# EAGLE board 2 bit calculator (EAGLE 9.7.0)

Size 198.19 x 253.51 mm. Coordinates in mm from the lower left corner, seen from the top.
Outline: 0,0 198.19,0 198.19,253.51 0,253.51 0,0
Copper layers (1*16): Top 0.035mm / dielectric 1.5mm / Bottom 0.035mm
Design rules "default": minimum track width 6mil, minimum drill 0.35mm, track to track 6mil, track to pad 6mil, pad to pad 6mil, via to via 6mil, smd to smd 6mil, copper to edge 40mil, drill to drill 6mil, minimum pad ring 10mil, minimum via ring 8mil, stop-mask expansion 4mil, vias tented up to drill 0mil, thermal gap 10mil

## Footprints (pad centres in the part's own frame; a part is rotated, then mirrored left to right if it is on the bottom)
LEDRD254W60D565H860B = drill 0.981 pad 1.581: 1 -1.27,0; 2 1.27,0
LEDRD254W60D565H860B_B = drill 0.981 pad 1.581: 1 -1.27,0; 2 1.27,0
LEDRD254W60D565H860B_Y = drill 0.981 pad 1.581: 1 -1.27,0; 2 1.27,0
BATTERY-GENERIC = drill 1.118 pad 3.15 octagon: + 2.54,0; - -2.54,0
SWITCH-SPDT-PTH-8.5X3.7MM = drill 1.016 pad 1.88: 1 -2.54,0; 2 0,0; 3 2.54,0
78B04ST = drill 0.8: 1 -3.81,-3.81; 2 -1.27,-3.81; 3 1.27,-3.81; 4 3.81,-3.81; 5 3.81,3.81; 6 1.27,3.81; 7 -1.27,3.81; 8 -3.81,3.81
DIP762W53P254L1969H508Q14B = drill 0.743 pad 1.343: 1 -3.81,7.62; 2 -3.81,5.08; 3 -3.81,2.54; 4 -3.81,0; 5 -3.81,-2.54; 6 -3.81,-5.08; 7 -3.81,-7.62; 8 3.81,-7.62; 9 3.81,-5.08; 10 3.81,-2.54; 11 3.81,0; 12 3.81,2.54; 13 3.81,5.08; 14 3.81,7.62

## Placement (x,y rotation side)
D1  RED  [LEDRD254W60D565H860B]  37.28,230.36 180 top
D2  RED  [LEDRD254W60D565H860B]  42.36,230.36 180 top
D3  RED  [LEDRD254W60D565H860B]  49.98,230.36 180 top
D4  RED  [LEDRD254W60D565H860B]  55.06,230.36 180 top
D5  BLUE  [LEDRD254W60D565H860B_B]  161.74,245.6 180 top
D6  BLUE  [LEDRD254W60D565H860B_B]  166.82,245.6 180 top
D7  BLUE  [LEDRD254W60D565H860B_B]  171.9,245.6 180 top
D8  BLUE  [LEDRD254W60D565H860B_B]  169,191.49 180 top
D9  YELLOW  [LEDRD254W60D565H860B_Y]  174.08,191.49 180 top
D10  YELLOW  [LEDRD254W60D565H860B_Y]  179.16,191.49 180 top
D11  YELLOW  [LEDRD254W60D565H860B_Y]  192.13,132.45 180 top
D12  YELLOW  [LEDRD254W60D565H860B_Y]  187.05,132.45 180 top
D13  YELLOW  [LEDRD254W60D565H860B_Y]  181.97,132.45 180 top
D14  YELLOW  [LEDRD254W60D565H860B_Y]  176.89,132.45 180 top
D15  YELLOW  [LEDRD254W60D565H860B_Y]  171.82,76.2 180 top
D16  YELLOW  [LEDRD254W60D565H860B_Y]  176.9,76.2 180 top
D17  YELLOW  [LEDRD254W60D565H860B_Y]  181.98,76.2 180 top
P1  BATTERYGENERIC  [BATTERY-GENERIC]  8.26,213.36 180 top
S1  TOGGLE  [SWITCH-SPDT-PTH-8.5X3.7MM]  61.41,240.52 0 top
SW2  SPST-478B04ST  [78B04ST]  47.44,213.85 0 top
U1  74HC86_PDIP  [DIP762W53P254L1969H508Q14B]  96.97,234.17 90 top
U2  74HC08_PDIP  [DIP762W53P254L1969H508Q14B]  119.83,234.17 90 top
U3  74HC04_PDIP  [DIP762W53P254L1969H508Q14B]  74.11,234.17 90 top
U4  74HC32_PDIP  [DIP762W53P254L1969H508Q14B]  142.69,234.17 90 top
U5  74HC04_PDIP  [DIP762W53P254L1969H508Q14B]  61.05,177.52 90 top
U6  74HC11_PDIP  [DIP762W53P254L1969H508Q14B]  81.37,177.52 90 top
U7  74HC11_PDIP  [DIP762W53P254L1969H508Q14B]  99.15,177.52 90 top
U8  74HC32_PDIP  [DIP762W53P254L1969H508Q14B]  137.25,177.52 90 top
U9  74HC32_PDIP  [DIP762W53P254L1969H508Q14B]  157.57,177.52 90 top
U10  74HC08_PDIP  [DIP762W53P254L1969H508Q14B]  116.93,177.52 90 top
U11  74HC21_PDIP  [DIP762W53P254L1969H508Q14B]  63.86,121.02 90 top
U12  74HC11_PDIP  [DIP762W53P254L1969H508Q14B]  86.72,121.02 90 top
U13  74HC11_PDIP  [DIP762W53P254L1969H508Q14B]  122.28,121.02 90 top
U14  74HC08_PDIP  [DIP762W53P254L1969H508Q14B]  142.6,121.02 90 top
U15  74HC32_PDIP  [DIP762W53P254L1969H508Q14B]  162.92,121.02 90 top
U16  74HC04_PDIP  [DIP762W53P254L1969H508Q14B]  104.5,121.02 90 top
U17  74HC04_PDIP  [DIP762W53P254L1969H508Q14B]  61.33,64.77 90 top
U18  74HC04_PDIP  [DIP762W53P254L1969H508Q14B]  63.84,8.41 90 top
U19  74HC08_PDIP  [DIP762W53P254L1969H508Q14B]  134.99,64.77 90 top
U20  74HC11_PDIP  [DIP762W53P254L1969H508Q14B]  86.73,64.77 90 top
U21  74HC11_PDIP  [DIP762W53P254L1969H508Q14B]  109.59,64.77 90 top
U22  74HC21_PDIP  [DIP762W53P254L1969H508Q14B]  91.78,8.41 90 top
U23  74HC21_PDIP  [DIP762W53P254L1969H508Q14B]  117.18,8.41 90 top
U24  74HC32_PDIP  [DIP762W53P254L1969H508Q14B]  157.85,64.77 90 top
U25  74HC32_PDIP  [DIP762W53P254L1969H508Q14B]  145.12,8.41 90 top

## Library data of the parts
D1-D4 = Tinkercad; CATEGORY: Opto-Electronic; SUB-CATEGORY: LED; VALUE: LED_RED
D5-D8 = Tinkercad; CATEGORY: Opto-Electronic; SUB-CATEGORY: LED; VALUE: LED_BLUE
D9-D17 = Tinkercad; CATEGORY: Opto-Electronic; SUB-CATEGORY: LED; VALUE: LED_YELLOW
P1 S1 SW2 U1-U25 = Tinkercad

## Nets
P1+: P1.+ S1.2 SW2.1 SW2.2 SW2.3 SW2.4 U1.14 U2.14 U3.14 U4.14 U5.14 U6.14 U7.14 U8.14 U9.14 U10.14 U11.14 U12.14 U13.14 U14.14 U15.14 U16.14 U17.14 U18.14 U19.14 U20.14 U21.14 U22.14 U23.14 U24.14 U25.14
P1-: D1.2 D2.2 D3.2 D4.2 D5.2 D6.2 D7.2 D8.2 D9.2 D10.2 D11.2 D12.2 D13.2 D14.2 D15.2 D16.2 D17.2 P1.- U1.7 U2.7 U3.7 U4.7 U5.7 U6.7 U7.7 U8.7 U9.7 U10.7 U11.7 U12.7 U13.7 U14.7 U15.7 U16.7 U17.7 U18.7 U19.7 U20.7 U21.7 U22.7 U23.7 U24.7 U25.7
U1_1Y: U1.3 U1.9 U2.1
U1_2Y: U1.6 U1.12 U2.9
U1_3Y: D7.1 U1.8
U1_4B: U1.13 U2.10 U4.3
U1_4Y: D6.1 U1.11
U2_1B: U2.2 U3.2
U2_1Y: U2.3 U4.1
U2_2Y: U2.6 U4.2
U2_3Y: U2.8 U4.12
U2_4Y: U2.11 U4.13
U3_1A: S1.3 U3.1 U3.13
U3_6Y: U1.10 U3.12
U4_4Y: D5.1 U4.11
U6_1Y: U6.12 U8.12
U6_2Y: U6.6 U8.10
U6_3B: U5.4 U6.2 U6.3 U6.10 U10.4
U6_3Y: U6.8 U9.12
U7_1Y: U7.12 U9.9
U7_2B: U5.12 U7.4 U7.13
U7_2C: U5.8 U7.5 U10.13
U7_2Y: U7.6 U9.10
U7_3A: U5.2 U6.1 U6.9 U7.9 U10.1
U7_3Y: U7.8 U9.13
U8_1Y: D10.1 U8.3
U8_3Y: D8.1 U8.8
U8_4Y: U8.9 U8.11
U9_2Y: D9.1 U9.6
U9_3Y: U9.5 U9.8
U9_4Y: U9.4 U9.11
U10_1Y: U8.13 U10.3
U10_2Y: U8.1 U10.6
U10_4Y: U8.2 U10.11
U11_1Y: D14.1 U11.6
U12_1Y: U12.12 U15.1
U12_2Y: U12.6 U15.2
U12_3Y: U12.8 U15.12
U13_1Y: U13.12 U15.13
U13_2Y: U13.6 U15.4
U13_3C: U12.13 U13.11 U16.8
U13_3Y: U13.8 U15.5
U14_4Y: D11.1 U14.11
U15_1Y: D13.1 U15.3
U15_2Y: U15.6 U15.10
U15_3Y: D12.1 U15.8
U15_4Y: U15.9 U15.11
U16_1Y: U13.3 U16.2
U16_2Y: U12.4 U13.2 U16.4
U16_6Y: U12.10 U16.12
U18_1Y: U18.2 U22.9 U23.1
U18_6Y: U18.12 U22.12 U23.4
U19_1Y: U19.3 U24.1
U19_4Y: U19.11 U24.13
U20_1A: U17.6 U20.1 U20.4
U20_1Y: U20.12 U24.2
U20_2A: U17.2 U19.1 U20.3
U20_2Y: U20.6 U24.5
U20_3B: D2.1 SW2.7 U1.1 U2.4 U5.3 U7.2 U10.12 U11.2 U13.4 U13.9 U14.12 U16.3 U17.5 U18.5 U20.10 U21.9 U22.2 U23.2
U20_3Y: U20.8 U24.12
U21_3B: U17.12 U19.13 U21.10
U21_3C: U17.8 U20.11 U21.11
U21_3Y: U21.8 U24.10
U22_1Y: U22.6 U25.2
U22_2Y: U22.8 U25.13
U23_1D: D4.1 SW2.5 U1.2 U2.5 U5.9 U6.5 U6.13 U7.11 U10.5 U11.5 U12.11 U13.13 U14.13 U16.9 U17.9 U18.9 U20.5 U20.13 U22.5 U23.5
U23_1Y: U23.6 U25.1
U23_2A: D1.1 SW2.8 U1.4 U2.12 U5.1 U7.1 U7.3 U11.1 U12.1 U12.3 U12.9 U13.1 U16.1 U17.1 U18.1 U19.12 U20.9 U22.1 U23.9
U23_2B: U18.6 U22.10 U23.10
U23_2C: D3.1 SW2.6 U1.5 U2.13 U5.13 U6.4 U6.11 U7.10 U10.2 U11.4 U12.2 U12.5 U13.5 U13.10 U16.13 U17.13 U18.13 U19.2 U20.2 U22.4 U23.12
U23_2D: U18.8 U22.13 U23.13
U23_2Y: U23.8 U25.12
U24_1Y: U24.3 U24.4
U24_2Y: D15.1 U24.6
U24_3Y: D16.1 U24.8
U24_4Y: U24.9 U24.11
U25_1Y: U25.3 U25.9
U25_3Y: D17.1 U25.8
U25_4Y: U25.10 U25.11

## Tracks (layer width: path | path; a pad name or v marks a point on that pad's centre or on a via)
P1+  (30 unrouted)
P1-  (42 unrouted)
U1_1Y  (2 unrouted)
U1_2Y  (2 unrouted)
U1_3Y  (1 unrouted)
U1_4B  (2 unrouted)
U1_4Y  (1 unrouted)
U2_1B  (1 unrouted)
U2_1Y  (1 unrouted)
U2_2Y  (1 unrouted)
U2_3Y  (1 unrouted)
U2_4Y  (1 unrouted)
U3_1A  (2 unrouted)
U3_6Y  (1 unrouted)
U4_4Y  (1 unrouted)
U6_1Y  (1 unrouted)
U6_2Y  (1 unrouted)
U6_3B  (4 unrouted)
U6_3Y  (1 unrouted)
U7_1Y  (1 unrouted)
U7_2B  (2 unrouted)
U7_2C  (2 unrouted)
U7_2Y  (1 unrouted)
U7_3A  (4 unrouted)
U7_3Y  (1 unrouted)
U8_1Y  (1 unrouted)
U8_3Y  (1 unrouted)
U8_4Y  (1 unrouted)
U9_2Y  (1 unrouted)
U9_3Y  (1 unrouted)
U9_4Y  (1 unrouted)
U10_1Y  (1 unrouted)
U10_2Y  (1 unrouted)
U10_4Y  (1 unrouted)
U11_1Y  (1 unrouted)
U12_1Y  (1 unrouted)
U12_2Y  (1 unrouted)
U12_3Y  (1 unrouted)
U13_1Y  (1 unrouted)
U13_2Y  (1 unrouted)
U13_3C  (2 unrouted)
U13_3Y  (1 unrouted)
U14_4Y  (1 unrouted)
U15_1Y  (1 unrouted)
U15_2Y  (1 unrouted)
U15_3Y  (1 unrouted)
U15_4Y  (1 unrouted)
U16_1Y  (1 unrouted)
U16_2Y  (2 unrouted)
U16_6Y  (1 unrouted)
U18_1Y  (2 unrouted)
U18_6Y  (2 unrouted)
U19_1Y  (1 unrouted)
U19_4Y  (1 unrouted)
U20_1A  (2 unrouted)
U20_1Y  (1 unrouted)
U20_2A  (2 unrouted)
U20_2Y  (1 unrouted)
U20_3B  (17 unrouted)
U20_3Y  (1 unrouted)
U21_3B  (2 unrouted)
U21_3C  (2 unrouted)
U21_3Y  (1 unrouted)
U22_1Y  (1 unrouted)
U22_2Y  (1 unrouted)
U23_1D  (19 unrouted)
U23_1Y  (1 unrouted)
U23_2A  (18 unrouted)
U23_2B  (2 unrouted)
U23_2C  (20 unrouted)
U23_2D  (2 unrouted)
U23_2Y  (1 unrouted)
U24_1Y  (1 unrouted)
U24_2Y  (1 unrouted)
U24_3Y  (1 unrouted)
U24_4Y  (1 unrouted)
U25_1Y  (1 unrouted)
U25_3Y  (1 unrouted)
U25_4Y  (1 unrouted)